# Altium PCB WOLFMAN.PcbDoc (part 2 of 2)
Units mil, origin at the board's own origin, x right, y up, seen from the top; angles counter-clockwise.
Board outline 1610.24 x 1562.99 mil, 4 copper layers (Top Layer, Signal Layer 1, Signal Layer 2, Bottom Layer), stack 30.635 mil thick; 161 components, 149 nets, 706 pads, 227 vias.
Unrouted connection lines stored in the file: 40.
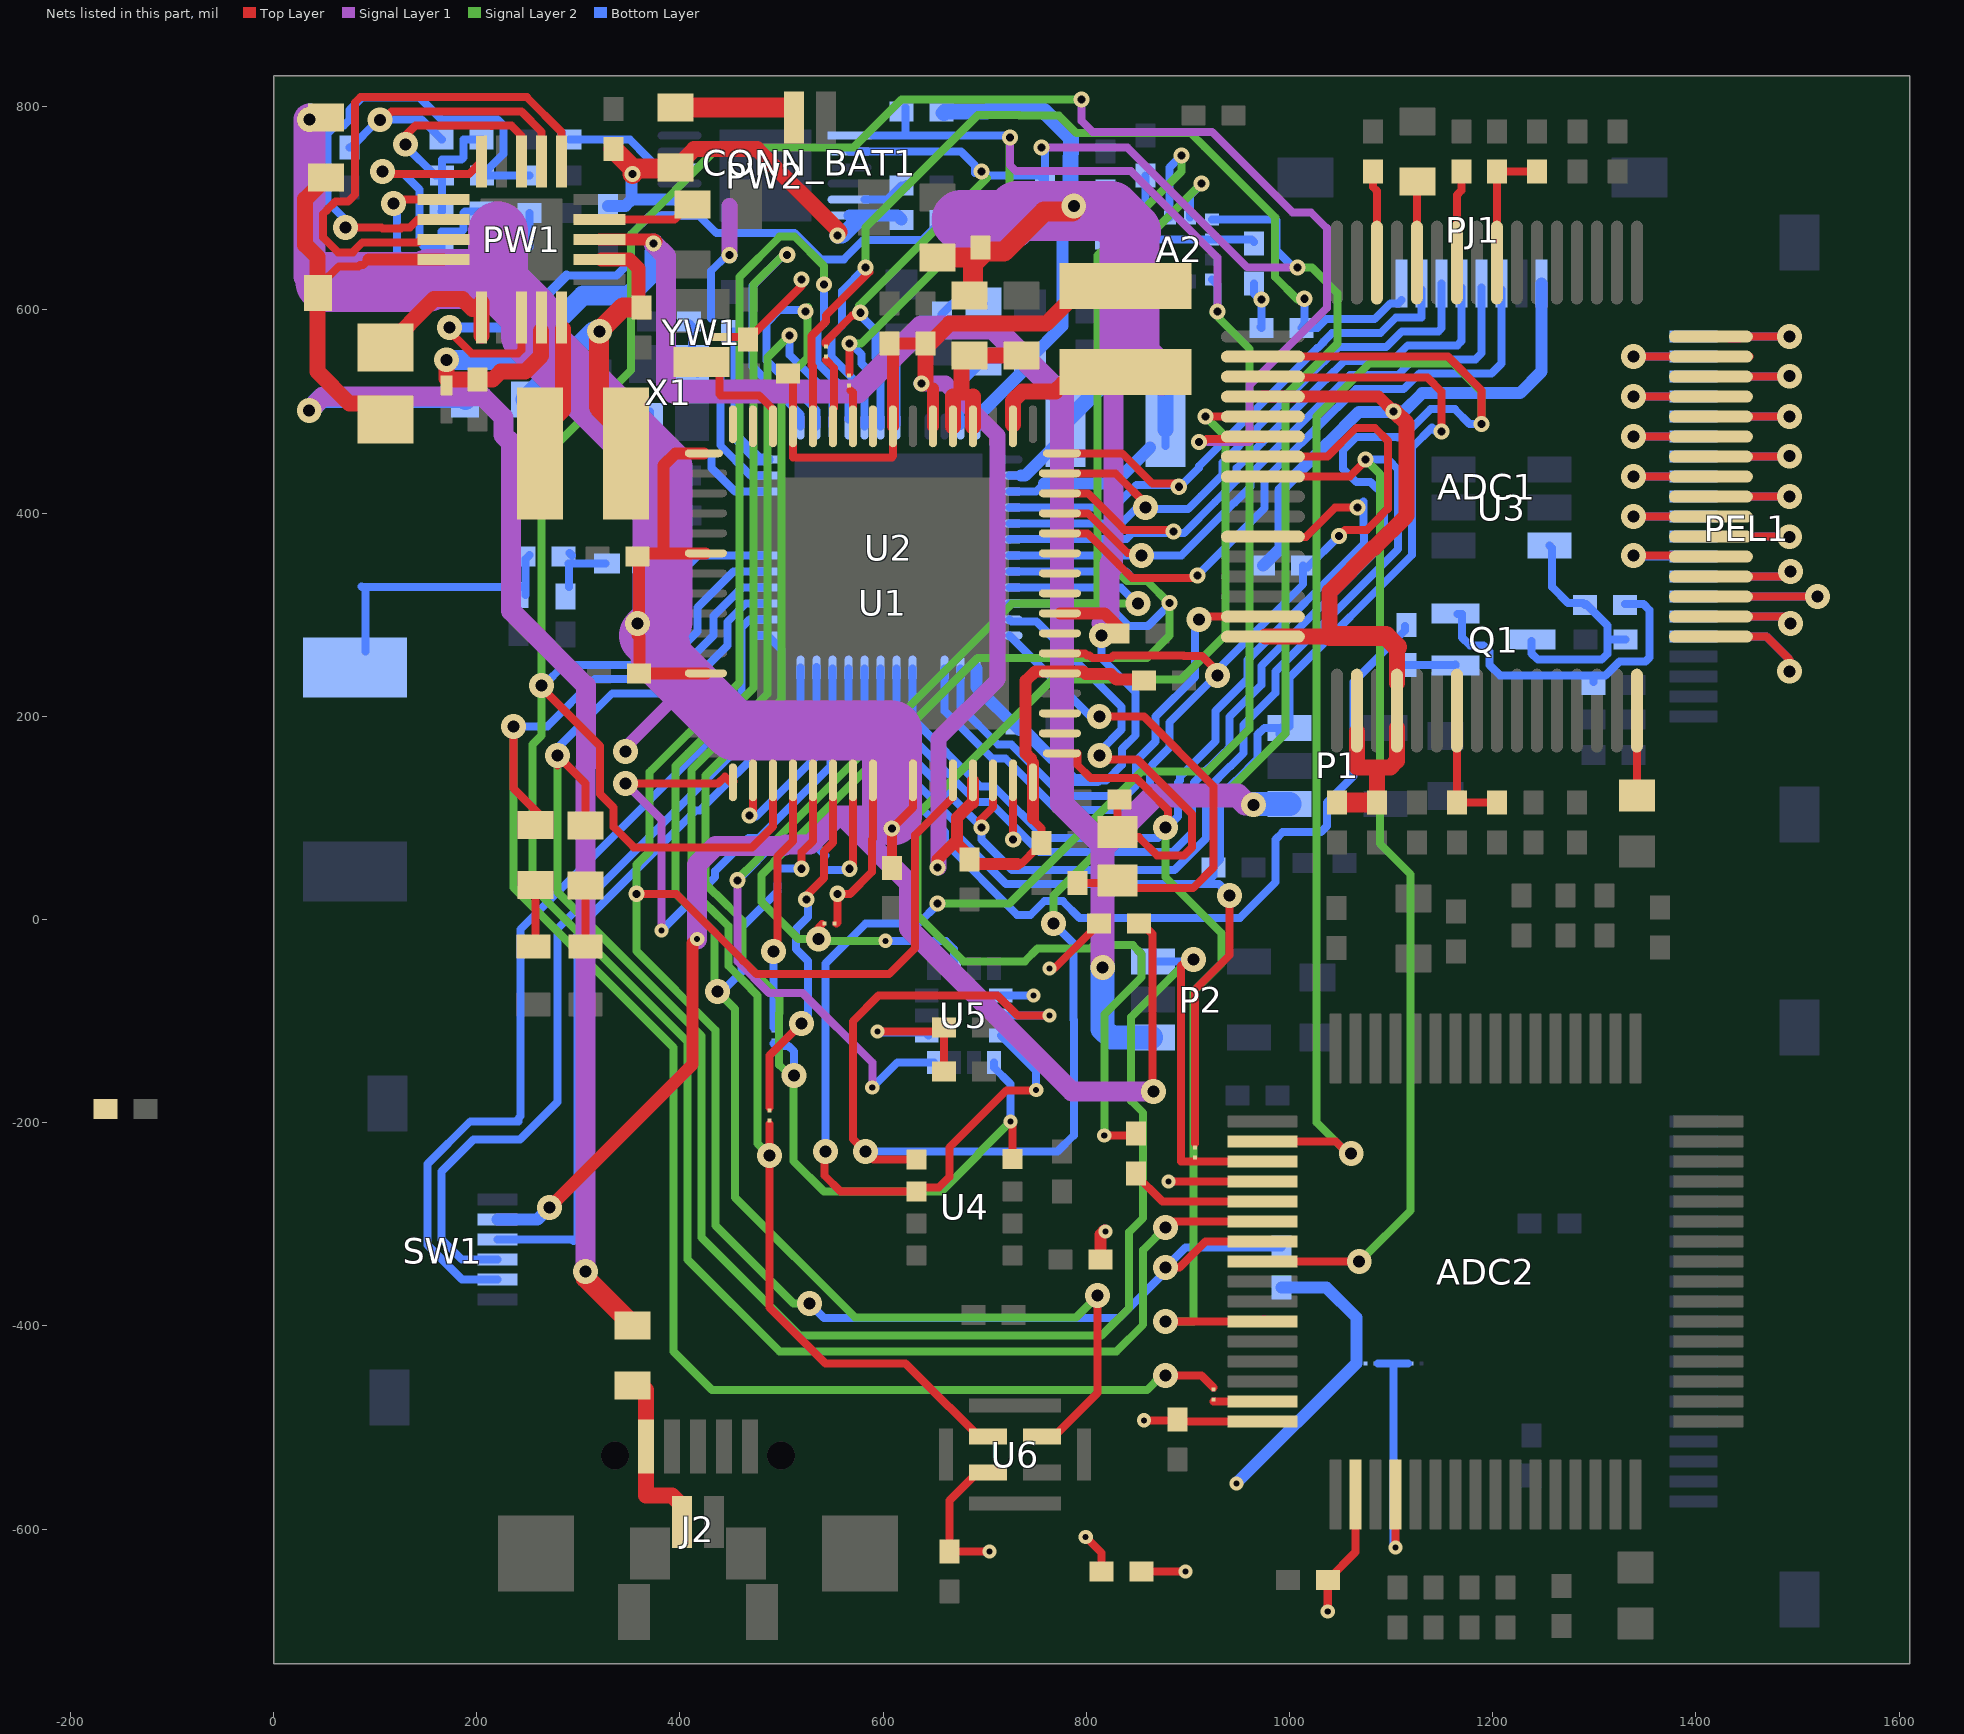
[diagram p4: the nets of this part, all layers, seen from the top]

## Via types
v1: diameter 24.41, hole 11.81, Top Layer to Bottom Layer, 92 vias
v2: diameter 14, hole 6, Top Layer to Bottom Layer, 55 vias
v3: diameter 16, hole 8, Top Layer to Bottom Layer, 36 vias
v4: diameter 25.98, hole 12.99, Top Layer to Bottom Layer, 16 vias
v5: diameter 24.41, hole 11.81, Top Layer to Bottom Layer, tented both sides, 13 vias
v6: diameter 16, hole 8, Top Layer to Bottom Layer, tented both sides, 13 vias
v7: diameter 16, hole 8, Top Layer to Bottom Layer, tented bottom, 2 vias

## Nets (pads, with @x,y where several pads share a name; then routed paths per layer and width w, separated by ;. In a path a pad name is that pad's centre, name@x,y a point inside that pad or via, vN(x,y) a via of type N, cw(c..) or ccw(c..) an arc to the next point about the centre after c; other vN are vias at no path point) (continued)
DVDD: ADC1.36 ADC1.48 ADC1.50 ADC1.52 ADC2.36 ADC2.48 ADC2.50 C1.2 C2.2 C3.2 C4.2 C5.2 C6.2 C7.2 C17.1 C20.1 C25.1 CC2.2 CC3.2 CC23.2 CC24.2 JM7.2 PJ1.1 R1.2 R5.2 R10.2 R18.1 R19.1 R21.1 R22.1 R23.1 R24.1 RVDVDD1.2 RVREG1.2 SW1.2 U1.1 U1.6 U1.12 U1.26 U1.40 U2.13 U2.36 U2.48 YW1.4 | length 7269.3
  Top Layer w7.87: YW1.4@438.98,573.63 C2.2@460.63,573.63 ; v6@448.82,653.54 v6@449.49,654.22 ; R23.1@847.07,-3.94 854.83,-3.94 865.2,-14.31 865.2,-168.35 v1(866.14,-169.29) v1@865.2,-170.23 ; v2(856.65,-492.87) 889.02,-492.87 CC23.2@889.76,-492.13 ; v2(880.72,-257.87) ADC2.36@973.43,-257.87 ADC2.36@996.06,-257.87 ; CC23.2@889.76,-494.09 ADC2.48@973.43,-494.09 ADC2.48@993.11,-494.09
  Top Layer w8: C2.2@467.12,570.87 519.68,623.43 v3(519.68,629.92) ; v3(608.54,89.55) 629.25,110.26 U1.26@629.25,137.09 U1.26@629.25,153.54 ; R24.1@854.33,-641.73 v2(897.64,-641.73) ; v2(1037.63,-681.1) CC24.2@1037.63,-649.85 1064.96,-622.52 ADC2.50@1064.96,-567.24
  Top Layer w10: C7.2@608.54,50.78 v3(608.54,89.55)
  Top Layer w11.81: v1(271.65,-283.46) 412.4,-142.72 v2@412.4,-23.06 ; v1(358.27,291.34) 358.27,280.32 359.52,279.07 ; C4.2@359.52,360.51 359.52,279.07 ; C5.2@359.64,242.8 360.03,242.4 U1.12@425.51,242.4 ; C4.2@359.64,360.51 383.86,360.51 ; C5.2@360.09,244.09 360.09,278.5 359.52,279.07 ; U1.1@423.54,458.94 395.81,458.94 383.86,446.99 383.86,360.51 ; U1.6@425.2,360.51 383.86,360.51 ; U1.40@773.94,301.46 817.92,301.46 C6.2@834.65,284.73 ; R21.1@813.99,-334.47 813.99,-310.04 v2@817.92,-306.11 ; ADC1.36@973.78,514.72 1087.64,514.72 v3(1102.36,500)
  Top Layer w15.75: ADC1.48@976.5,278.5 1034.78,278.5 ; 1039.37,279.07 1039.37,322.83 1082.28,365.75 1083.4,365.75 1115.3,397.65 1115.3,488.4 1103.7,500 v3(1102.36,500) ; ADC1.50@1066.3,185.04 1066.3,149.61 1099.14,149.61 1105.67,156.14 ADC1.52@1105.67,188.41 ; CC2.2@1085.98,115.2 1085.98,149.35 ; ADC1.52@1105.67,232.91 1105.67,268.35
  Top Layer w19.68: C1.2@653.54,651.57 688.64,651.57 C3.2@688.98,651.91 ; RVREG1.2@688.31,612.84 688.31,645.28 700.51,657.48 719.14,657.48 758.54,696.88 v1@786.48,696.88 ; 1039.37,279.07 1094.95,279.07 1105.67,268.35 ; CC3.2@1046.61,115.2 CC2.2@1085.98,115.2
  Signal Layer 1 w7.87: 812.72,295.28 814.96,293.03 v5(814.96,279.53)
  Signal Layer 1 w11.81: v1(346.46,165.35) 342.13,165.35 397.24,220.47
  Signal Layer 1 w15.75: v6(448.82,653.94) 448.82,702.44
  Signal Layer 1 w19.68: v2@416.96,-19.68 v2(416.96,-19.12) 416.96,54.4 434.76,72.2 502.35,72.2 503.9,73.75 528.01,73.75 556.62,102.36 ; 608.54,102.36 559.06,102.36 625.59,35.83 625.59,-8.96 785.92,-169.29 v1(866.14,-169.29) ; v5@814.96,291.34 822.83,299.21 822.83,350.23 826.38,346.69 826.38,369.85 826.77,370.24 826.77,686.51 830.71,690.45
  Signal Layer 1 w31.5: 35.43,633.46 v5(35.43,787.4)
  Signal Layer 1 w39.37: 842.52,557.52 851.93,557.52 874.02,535.43
  Signal Layer 1 w59.06: 51.18,627.65 150.83,627.65 153.49,630.31 218.39,630.31 221.06,627.65 ; 221.06,677.17 221.06,627.65 ; 608.54,102.36 608.54,185.98 453.63,185.98 380.72,258.9 380.72,268.26 369.29,279.69 382.92,293.32 382.92,445.26 253.54,574.64 253.54,595.17 221.06,627.65 ; 677.12,688.58 723.57,688.58 732.24,697.24 823.92,697.24 830.71,690.45 842.52,678.64 ; 842.52,557.52 842.52,678.64 ; 843.99,677.17 842.52,678.64
  Bottom Layer w7.87: 430.79,591.41 430.79,638.52 446.2,653.94 v6(448.82,653.94) ; 813.15,137.8 814.26,136.69 819.53,136.69 835.2,152.36 835.2,168.08 848.54,181.42 848.54,223.59 835.2,236.93 835.2,237.37 ; v5(814.96,279.53) 814.96,257.17 834.76,237.37 ; R22.1@964.9,625.98 964.9,616.04 v3@970.71,610.24 ; R1.2@972.44,582.05 971.44,583.05 972.44,584.05 v3(972.44,610.24)
  Bottom Layer w11.81: SW1.2@220.47,-295.28 259.84,-295.28 v1(271.65,-283.46) ; C20.1@452.76,576.77 455.43,574.09 455.43,474.68 477.36,452.76 U2.36@486.22,452.76 ; R18.1@657.48,793.7 R18.1@659.84,793.7 ; U2.13@691.93,247.05 691.93,228.83 C25.1@734.03,186.73 ; U2.48@691.93,485.24 691.93,494.09 C17.1@748.03,550.2 ; C25.1@732.28,191.81 732.28,191.34 734.02,191.34 748.03,177.32 748.03,177.08 787.63,137.47 810.89,137.47 ; C17.1@744.69,552.44 776.57,584.33 776.57,681.28 783.46,688.16 ; R19.1@759.08,685.04 776.4,685.04 779.53,688.16 ; v2(947.7,-555.12) 947.7,-554.98 1065.67,-437.01 1065.67,-391.6 1036.27,-362.2 R10.2@992.13,-362.2 ; R5.2@974.01,348.44 991.26,365.69 991.26,422.76 1036.91,468.41 1037,468.41 1068.36,499.76 v3@1100.81,499.76 ; v3(1102.36,500) 1112.4,500 1130.51,518.11 1226.77,518.11 1248.03,539.37 PJ1.1@1248.03,625.98
  Bottom Layer w15.75: R18.1@659.84,793.7 661.42,795.28 701.83,795.28 702.26,795.7 758.36,795.7 784.78,769.28 783.7,702.5 783.46,688.16
  other v1: 787.63,702.44
  other v2: 818.9,-307.09
DVDD_OUT: CC35.2 L4.2 PW1.14 RVDVDD1.1 | length 409.1
  Top Layer w7.87: CC35.2@47.24,625.98 64.17,642.91 83.72,642.91 84.9,644.09 87.94,644.09 93.45,649.61
  Top Layer w11.81: 93.45,649.61 PW1.14@167.32,649.61
  Top Layer w15.75: RVDVDD1.1@52.83,730.75 31.1,709.01 31.1,664.12 43.31,651.91 43.31,539.33 74.76,507.87 L4.2@104.01,507.87
EL1: ADC1.16 PEL1.20 | length 183.1
  Top Layer w7.87: ADC1.16@1414.72,573.78 v1(1492.13,573.78) ; ADC1.16@1433.07,571.81 ADC1.16@1442.8,571.81
  Bottom Layer w7.87: PEL1.20@1397.64,573.78 v1(1492.13,573.78) v1@1493.15,574.8
EL2: ADC1.14 PEL1.18 | length 173.7
  Top Layer w7.87: ADC1.14@1414.72,534.41 1491.74,534.41 v1(1492.13,534.8)
  Bottom Layer w7.87: PEL1.18@1397.64,534.41 1491.73,534.41 v1@1493.15,535.83
EL3: ADC1.12 PEL1.16 | length 172.9
  Top Layer w7.87: ADC1.12@1414.72,495.04 v1@1491.74,495.04
  Bottom Layer w7.87: PEL1.16@1397.64,495.04 v1(1492.13,495.04) v1@1493.15,496.06
EL4: ADC1.10 PEL1.14 | length 173.6
  Top Layer w7.87: ADC1.10@1414.72,455.67 1491.46,455.67 v1@1492.13,455
  Bottom Layer w7.87: PEL1.14@1397.64,455.67 1492.13,455.67 v1@1493.15,456.69
  other v1: 1492.13,456.02
EL5: ADC1.8 PEL1.12 | length 172.9
  Top Layer w7.87: ADC1.8@1414.72,416.3 v1(1492.13,416.3)
  Bottom Layer w7.87: PEL1.12@1397.64,416.3 v1@1493.15,416.3
EL6: ADC1.6 PEL1.10 | length 173.1
  Top Layer w7.87: ADC1.6@1414.72,376.93 1491.94,376.93 v1(1492.13,376.75)
  Bottom Layer w7.87: PEL1.10@1397.64,376.93 1492.97,376.93 v1@1493.15,376.75
EL7: ADC1.4 PEL1.8 | length 175.9
  Top Layer w7.87: ADC1.4@1414.72,337.56 v1@1490.12,337.56
  Bottom Layer w7.87: PEL1.8@1397.64,337.56 1491.1,337.56 v1@1496.06,342.52
  other v1: 1493.15,342.52
EL8: ADC1.2 PEL1.6 | length 182.2
  Top Layer w7.87: ADC1.2@1417.32,299.21 1418.35,298.19 1493.15,298.19 v1(1493.15,291.34)
  Bottom Layer w7.87: PEL1.6@1397.64,298.19 1484.39,298.19 v1@1493.15,289.43
ELM1: ADC1.15 PEL1.19 | length 172.1
  Top Layer w7.87: v1(1338.58,554.09) ADC1.15@1414.72,554.09 ADC1.15@1452.74,554.09
  Bottom Layer w7.87: v1@1340.17,555.12 1341.19,554.09 PEL1.19@1397.64,554.09
ELM2: ADC1.13 PEL1.17 | length 141.9
  Top Layer w7.87: v1(1338.58,514.72) ADC1.13@1414.72,514.72 ADC1.13@1417.32,514.72
  Bottom Layer w7.87: v1@1334.91,515.75 1335.93,514.72 PEL1.17@1397.64,514.72
ELM3: ADC1.11 PEL1.15 | length 134.6
  Top Layer w7.87: v1(1338.58,475.51) 1412.83,475.51 ADC1.11@1412.99,475.35 ; ADC1.11@1414.72,475.35 ADC1.11@1415.12,475.75 ; ADC1.11@1419.32,475.75 ADC1.11@1419.56,475.51
  Bottom Layer w7.87: v1@1338.44,475.51 1338.6,475.35 PEL1.15@1397.64,475.35
ELM4: ADC1.9 PEL1.13 | length 130.1
  Top Layer w7.87: v1(1338.58,435.98) ADC1.9@1409.45,435.98
  Bottom Layer w7.87: v1@1338.44,435.98 v1(1338.58,435.98) PEL1.13@1397.64,435.98
ELM5: ADC1.7 PEL1.11 | length 134.4
  Top Layer w7.87: v1(1338.58,396.77) 1412.99,396.77 ADC1.7@1413.39,396.38
  Bottom Layer w7.87: v1@1338.6,397.49 1339.48,396.61 PEL1.11@1397.64,396.61
ELM6: ADC1.5 PEL1.9 | length 138.4
  Top Layer w7.87: v1(1338.58,358.27) ADC1.5@1417.32,358.27
  Bottom Layer w7.87: v1@1338.44,358.27 1339.47,357.24 PEL1.9@1397.64,357.24
ELM7: ADC1.3 PEL1.7 | length 231
  Top Layer w7.87: ADC1.3@1414.72,317.87 v1@1523.62,317.87
  Bottom Layer w7.87: PEL1.7@1397.64,317.87 v1(1519.68,317.87) v1(1519.68,317.87)
ELM8: ADC1.1 PEL1.5 | length 213.6
  Top Layer w7.87: ADC1.1@1414.72,278.5 1469.53,278.5 1492.13,255.91 v1(1492.13,244.34)
  Bottom Layer w7.87: PEL1.5@1397.64,278.5 1469.53,278.5 1491.1,256.93 v1@1491.1,244.03
I2C.SCL: U1.63
I2C.SDA: U1.64
I2S0_SCK: U1.43
I2S0_SDI: U1.41
I2S0_WS: U1.42
I2S1_SDI: U1.39
IMU_A_DVDD: A2.2 A2.9 A2.10 CA1.2 CA2.2 CA3.2 R22.2 | length 256.2
  Bottom Layer w7.87: CA2.2@818.9,672.09 CA1.2@818.9,716.54 ; CA2.2@819.61,671.05 821.09,669.57 A2.9@860.63,669.57 ; CA3.2@858.27,732.28 858.27,692.21 A2.10@861.43,689.05 ; A2.10@859.51,689.25 860.63,688.14 A2.9@860.63,669.57 ; A2.2@923.62,669.29 923.34,669.57 A2.9@860.63,669.57 ; A2.2@923.62,669.57 962.41,669.57 R22.2@964.9,667.07
IN_CS_ADC_A: ADC1.39 R5.1 U1.38 U2.15 | length 1057.1
  Top Layer w7.87: U1.38@773.94,262.09 798.86,262.09 800.85,260.09 803.22,260.09 805.83,257.48 824.09,257.48 826.7,260.09 895.41,260.09 896.05,259.45 913.78,259.45 929.13,244.09 v1(929.13,240.16) ; ADC1.39@973.78,455.67 1037.32,455.67 1065.67,484.02 1083.94,484.02 1096.85,471.1 1096.85,404.25 ; v3(1048.58,377.6) 1054.45,383.46 1076.06,383.46 1088.97,396.38 1088.97,396.77 1096.46,404.25
  Bottom Layer w7.87: U2.15@660.43,247.05 660.43,205.45 707.54,158.35 720.65,158.35 771.13,107.87 844.29,107.87 862.76,126.34 862.76,146.3 864.57,148.11 864.57,152.17 881.89,169.5 881.89,175.9 881.89,194.17 931.81,244.09 931.81,248.52 1013.38,330.09 R5.1@1013.38,348.44 ; R5.1@1015.75,346.46 1017.44,346.46 v3(1048.58,377.6)
IN_CS_ADC_B: ADC2.39 R10.1 U1.28 U2.40 | length 2510.2
  Top Layer w7.87: v3(357.22,25.28) 396.38,25.28 462.2,-40.55 462.2,-40.63 475.12,-53.54 605.98,-53.54 631.49,-28.03 631.49,83.22 668.62,120.35 U1.28@668.62,137.09 ; v1(877.95,-342.52) 891.73,-342.52 917.32,-316.93 ADC2.39@973.43,-316.93
  Signal Layer 2 w7.87: 357.22,54.07 370.08,66.93 370.08,145.08 372.19,147.18 458.66,233.66 458.66,632.58 498.14,672.06 512.92,672.06 541.69,643.29 v3(541.69,625) ; 358.27,54.07 357.22,53.02 v3(357.22,25.28) 357.22,-31.04 435.04,-108.86 435.04,-301.18 511.81,-377.95 v1@525.59,-377.95
  Bottom Layer w7.87: v1(527.56,-377.95) 541.73,-392.13 832.28,-392.13 v1@877.95,-346.46 ; v3(541.69,625) 541.69,586.41 535.31,580.03 535.31,547.88 565.94,517.24 U2.40@565.94,492.13 ; v1(877.95,-342.52) 897.67,-322.83 R10.1@992.13,-322.83
JTAG.T\R\S\T\: PJ1.7 U1.48 U2.4 | length 641.6
  Top Layer w7.87: U1.48@775.91,458.94 835.3,458.94 865.2,429.04 887.52,429.04 v7@890.57,425.98
  Bottom Layer w7.87: U2.4@724.41,405.51 724.48,405.44 826.53,405.44 836.05,414.96 836.22,414.96 849.11,427.85 889.15,427.85 v7(891.02,425.98) 891.02,426.46 891.49,425.98 892.24,425.98 910.89,444.63 910.89,446.19 961.98,497.27 1027.1,562.36 1027.7,562.36 1033.46,568.13 1033.46,568.73 1041.9,577.17 1089.34,577.17 1104.97,592.8 1129.33,592.8 ; 1129.92,592.8 PJ1.7@1129.92,620.08
JTAG.TCK: PJ1.3 U1.44 U2.8 | length 818.4
  Top Layer w7.87: U1.44@773.94,380.2 801.05,380.2 832.28,348.96 832.28,348.82 844.88,336.22 907.09,336.22 v3(909.45,338.58)
  Bottom Layer w7.87: U2.8@724.41,342.52 838.9,342.52 845.2,336.22 906.7,336.22 975.51,405.03 975.51,432.83 1046.18,503.5 1046.79,503.5 1065.33,522.05 1112.17,522.05 1127.8,537.68 1182.75,537.68 1183.03,537.4 1198.82,537.4 1208.66,547.24 PJ1.3@1208.66,620.08
JTAG.TDI: PJ1.6 U1.47 U2.5 | length 661.6
  Top Layer w7.87: U1.47@773.94,439.25 828.46,439.25 v1@862.2,405.51
  Bottom Layer w7.87: U2.5@724.41,389.76 759.08,389.76 ; 754.37,389.76 834.41,389.76 850.15,405.51 v1(858.26,405.51) ; v1@861.5,405.77 863.33,403.94 894.96,403.94 900.15,403.94 913.07,416.85 913.07,416.93 934.17,438.03 934.17,449.98 967.69,483.49 1032.8,548.58 1033.41,548.58 1047.24,562.42 1047.24,563.02 1047.61,563.39 1095.05,563.39 1110.68,579.02 1146.57,579.02 1149.61,582.05 PJ1.6@1149.61,626.26
JTAG.TDO: PJ1.5 U1.46 U2.6 | length 711
  Top Layer w7.87: U1.46@773.94,419.57 801.63,419.57 834.56,386.63 834.56,386.57 837.67,383.46 884.25,383.46 v3(885.83,381.89)
  Bottom Layer w7.87: U2.6@724.41,374.02 724.8,374.41 839.29,374.41 845.2,380.31 896.02,380.31 926.85,411.14 926.85,411.22 947.95,432.32 947.95,444.27 973.4,469.72 1034.77,531.06 1035.37,531.06 1053.92,549.61 1100.76,549.61 1116.39,565.24 1165.08,565.24 1169.29,569.45 1169.29,576.77 ; 1169.29,578.74 PJ1.5@1169.29,622.05
JTAG.TMS: PJ1.4 U1.45 U2.7 | length 700.6
  Top Layer w7.87: U1.45@773.94,399.88 801.45,399.88 840.71,360.63 v1@847.71,360.63
  Bottom Layer w7.87: U2.7@724.41,358.27 v1(854.33,358.27) ; v1@862.82,358.27 893.46,358.27 940.63,405.44 940.63,405.51 945.59,410.47 946.1,410.47 961.73,426.1 961.73,438.54 1040.48,517.28 1041.08,517.28 1059.62,535.83 1106.47,535.83 1122.1,551.46 1183.03,551.46 1188.98,557.4 1188.98,571.01 PJ1.4@1188.98,622.05
LED_1: JM5.1 R2.2 U2.28 | length 1654.6
  Top Layer w7.87: v1(236.22,190.04) 236.22,128.97 262.39,102.8 R2.2@263.78,102.8 ; v1(877.98,-448.82) 913.39,-448.82 925.2,-460.63
  Signal Layer 2 w7.87: v1@236.22,192.91 v1(236.22,190.04) 236.22,31.5 393.7,-125.98 393.7,-425.2 431.5,-462.99 859.84,-462.99 v1@874.02,-448.82
  Bottom Layer w7.87: v1(236.22,190.04) 236.41,190.23 269.48,190.23 316.19,236.93 390.27,236.93 433.07,279.73 433.07,298.82 461.03,326.77 U2.28@486.22,326.77
LED_2: ADC2.35 JM6.2 P2.3 R3.2 U2.27 | length 2116.4
  Top Layer w7.87: v1(279.53,161.49) 279.53,151.59 284.48,156.54 307.09,133.93 R3.2@307.09,92.52 R3.2@307.09,91.46 ; v5(905.51,-39.37) 899.29,-39.37 893.31,-45.35 893.31,-238.19 ADC2.35@973.43,-238.19 ADC2.35@993.11,-238.19
  Signal Layer 2 w7.87: v1(279.53,161.49) 279.53,27.16 421.26,-114.57 421.26,-312.99 517.72,-409.45 814.96,-409.45 842.12,-382.29 842.12,-307.48 855.9,-293.7 855.9,-190.23 844.09,-178.42 844.09,-95.91 899.06,-40.95 903.93,-40.95 v5(905.51,-39.37)
  Bottom Layer w7.87: v1(279.53,161.49) 278.97,161.49 275.59,164.87 333.43,222.71 399.88,222.71 446.85,269.68 446.85,293.11 464.76,311.02 U2.27@486.22,311.02 ; P2.3@865.83,-41.34 903.45,-41.34 v5@905.42,-39.37
MIC_DVDD: CA10.2 R24.2 U6.VDD | length 177
  Top Layer w7.87: U6.VDD@700.79,-544.29 692.84,-544.29 665.35,-571.78 CA10.2@665.35,-622.05 v2(704.72,-622.05) ; v2(799.3,-607.64) 814.96,-623.29 R24.2@814.96,-641.73
MISO: ADC1.43 ADC2.43 U1.33 U2.17 | length 1662.5
  Top Layer w7.87: U1.33@775.91,163.66 791.11,163.66 791.11,152.36 804.02,139.44 848.97,139.44 860.92,127.49 860.92,127.27 880.32,107.87 v1@880.32,92.52 ; v1(877.98,-395.67) 972.76,-395.67 ADC2.43@974.72,-393.7 ; ADC1.43@970.64,376.75 1016.14,376.75 1044.9,405.51 v3(1066.92,405.51)
  Signal Layer 2 w7.87: v1(877.95,90.55) 877.95,41.74 933.07,-13.39 933.07,-43.31 905.51,-70.87 905.51,-395.67 v1(877.98,-395.67)
  Bottom Layer w7.87: U2.17@628.94,247.05 628.94,197.98 696.13,130.79 709.24,130.79 759.71,80.31 870.41,80.31 v1@877.95,87.86 ; v1@879.5,90.55 890.32,101.37 890.32,134.88 892.12,136.69 892.12,140.76 902.82,151.45 ; 903.35,151.97 903.62,151.97 927.17,175.51 927.17,205.32 958.66,236.81 958.66,255.44 1073.03,369.81 1073.03,380.18 1072.7,380.5 1072.7,411.54 1066.92,405.77 v3(1066.92,405.51)
MLIMU_DVDD: CA6.2 CA7.2 CA8.2 R23.2 U5.5 U5.12 | length 255.4
  Top Layer w7.87: v2(594.49,-110.24) 659.01,-110.24 659.72,-110.95 CA8.2@659.72,-149.61 ; v2(763.78,-48.23) 768.31,-48.23 R23.2@812.6,-3.94
  Bottom Layer w7.87: v2(594.49,-110.24) 595.47,-111.22 641.73,-111.22 U5.5@644.69,-114.17 ; U5.12@715.83,-74.8 v2(748.03,-74.8)
MOSI: ADC1.34 ADC2.34 U1.31 U2.18 | length 2400.3
  Top Layer w7.87: v3@727.68,80.95 U1.31@727.68,137.09 ; ADC1.34@973.78,554.09 1155.82,554.09 1188.98,520.94 v3(1188.98,487.87) ; ADC2.34@993.11,-218.5 1045.51,-218.5 v1@1059.29,-232.28
  Signal Layer 2 w7.87: v1@1059.06,-224.41 1051.41,-224.41 1026.54,-199.54 1026.54,495.25 1078.53,547.24 1161.42,547.24 1188.98,519.68 v3(1188.98,487.87)
  Bottom Layer w7.87: U2.18@613.19,247.05 613.19,194.24 691.56,115.87 704.67,115.87 754,66.54 885.12,66.54 904.1,85.52 904.1,129.18 905.9,130.98 905.9,134.77 936.28,165.15 936.64,165.15 940.94,169.45 940.94,199.61 972.44,231.1 972.44,249.74 1093.17,370.47 1093.17,417.32 1079.79,430.71 1065.67,430.71 1052.75,443.62 1052.75,461.88 1065.67,474.8 1108.97,474.8 ; 1106.95,474.68 1111.02,474.68 1138.7,502.36 1162.67,502.36 1177.16,487.87 v3(1188.98,487.87)
  other v1: 1060.63,-230.31
  other v3: 727.95,78.74
NetA1_1: A1.1 XX1.2 XX3.1 | length 266.2
  Bottom Layer w7.87: 86.61,327.72 86.93,327.4 90.55,327.4 ; A1.1@90.55,263.78 90.55,327.4 ; XX3.1@248.03,319.21 XX3.1@248.03,327.4 ; XX1.2@251.97,358.65 248.03,354.71 XX3.1@248.03,327.4 ; 90.55,327.4 XX3.1@248.03,327.4
NetADC1_37: ADC1.37 RJ2.1 | length 1225.3
  Top Layer w7.87: v2(817.65,-212.6) 847,-212.6 RJ2.1@848.97,-210.63 ; v7(917.32,495.04) ADC1.37@968.5,495.04
  Signal Layer 2 w7.87: v2(817.65,-212.6) 817.65,-93.37 854.33,-56.69 854.33,-33.86 845.67,-25.2 806.92,-25.2 803.54,-28.57 751.97,-28.57 739.42,-41.12 679.23,-41.12 633.86,4.25 633.86,103.35 766.73,236.22 893.26,236.22 937.01,279.97 937.01,475.35 v7(917.32,495.04)
NetADC2_37: ADC2.37 RJ2.2 | length 137
  Top Layer w7.87: RJ2.2@847.71,-250.39 874.88,-277.56 ADC2.37@973.43,-277.56
NetADC2_47: ADC2.47 JM5.2 | length 67.9
  Top Layer w7.87: 925.2,-474.41 ADC2.47@993.11,-474.41
NetADC2_52: ADC2.52 JM7.1 JM8.2 | length 263.7
  Top Layer w8: v2(1104.33,-618.11) ADC2.52@1104.33,-565.94
  Bottom Layer w7.87: 1087.15,-437.01 1116.72,-437.01
  Bottom Layer w8: 1102.36,-437.01 1102.36,-616.14 v2(1104.33,-618.11)
NetC23_2: C23.2 L3.1 U2.30 | length 117.8
  Bottom Layer w7.87: L3.1@363.66,348.44 364.56,347.55 C23.2@401.57,347.55 ; 410,350.28 417.99,358.27 U2.30@486.22,358.27
NetCC39_2: CC39.2 PW1.4 | length 94.6
  Top Layer w7.87: PW1.4@320.87,688.98 394.81,688.98 CC39.2@409.44,703.61
NetCC41_2: CC41.2 PW2.5 | length 47.3
  Bottom Layer w7.87: PW2.5@581.69,708.66 604.12,708.66 CC41.2@618.11,722.65 ; CC41.2@623.03,721.73 620.92,721.73 CC41.2@623.03,723.84
NetD1_1: D1.1 R2.1 | length 58.8
  Top Layer w7.87: D1.1@257.87,-24.61 R2.1@257.87,34.17
NetD2_1: D2.1 R3.1 | length 61.7
  Top Layer w7.87: R3.1@307.09,33.46 307.09,-22.64 D2.1@311.02,-26.57
NetJ2_1: J2.1 R25.1 | length 61.8
  Top Layer w15.75: R25.1@362.2,-458.66 366.54,-462.99 J2.1@366.54,-518.7
NetL1_2: L1.2 L2.1 | length 45.8
  Bottom Layer w7.87: L1.2@657.48,595.47 668.31,606.3 L2.1@698.81,606.3
NetL2_2: L2.2 U2.47 | length 73
  Bottom Layer w7.87: U2.47@676.18,485.83 676.18,526.86 L2.2@698.81,549.49
NetL4_1: L4.1 PW1.16 | length 141.6
  Top Layer w15.75: L4.1@110.24,562.99 157.87,610.63 185.96,610.63 195.61,600.98 ; PW1.16@204.72,574.8 PW1.16@204.72,592.52 PW1.16@204.72,607.3
NetL5_2: L5.2 PW1.20 | length 115.6
  Top Layer w11.02: L5.2@271.65,487.48 273.19,489.02 L5.2@273.62,489.45
  Top Layer w15.75: L5.2@262.2,500 273.19,489.02 272.83,489.37 285.04,501.57 PW1.20@285.04,581.1
NetLW1_2: LW1.2 U1.50 | length 122.5
  Top Layer w7.87: LW1.2@838.58,531.76 LW1.2@838.58,538.86
  Top Layer w15.75: U1.50@727.68,487.48 727.68,510.5 737.14,519.96 769.45,519.96 777.05,527.56 LW1.2@783.46,527.56 ; LW1.2@781.54,539.37 LW1.2@811.02,539.37
NetPW1_6: PW1.6 PW1.13 | length 510.7
  Top Layer w7.87: 52.43,698.24 60.88,706.69 73.43,706.69 80.31,713.58 80.31,804.4 85.36,809.45 249.21,809.45 283.46,775.19 PW1.6@283.46,746.06 ; 52.54,698.24 52.43,698.13 52.33,698.13 48.82,694.63 48.82,671.46 63.58,656.69 78.01,656.69 78.01,657.07 87.56,666.61 142.36,666.61 PW1.13@145.67,669.92
NetPW1_7: PW1.7 R11.2 R15.1 | length 282.4
  Top Layer w7.87: v1@106.3,785.43 116.14,795.28 243.9,795.28 263.78,775.39 PW1.7@263.78,769.69
  Bottom Layer w7.87: R15.1@74.8,759.84 76.1,759.84 v1@101.6,785.35 ; v1(104.62,787.2) 104.62,787.59 145.68,787.59 159.65,773.62 R11.2@165.58,767.72
NetPW1_8: PW1.8 R11.1 R12.1 R13.1 | length 300.9
  Top Layer w7.87: v1(129.92,763.07) 129.92,771.65 139.76,781.5 214.31,781.5 214.57,781.24 214.82,781.5 234,781.5 244.09,771.4 244.09,767.91 PW1.8@243.9,767.72
  Bottom Layer w7.87: v1@124.21,765.54 125.97,763.78 127.65,763.78 v1@129.92,761.51 ; v1(129.92,763.07) v1@129.92,761.51 ; R12.1@165.35,696.85 165.58,697.08 R13.1@165.58,732.28 ; R11.1@204.95,767.72 R11.1@204.72,767.72 187.01,767.72 187.01,749.91 185.12,748.03 165.58,748.03 R13.1@165.58,732.28 ; v1@129.92,761.51 159.15,732.28 R13.1@165.58,732.28
NetPW1_10: PW1.10 R12.2 R14.1 | length 308.9
  Top Layer w7.87: v1(107.08,736.22) v1@105.51,736.22 ; PW1.10@204.72,746.06 192.52,733.85 107.87,733.85 v1@105.51,736.22 ; v1@102.76,738.97 102.36,739.37 102.76,739.76 v1@102.76,738.97 ; v1@102.76,738.97 v1@105.51,736.22
  Bottom Layer w7.87: v1(107.08,736.22) 107.08,735.78 105.14,733.84 128.37,733.84 143.7,718.5 143.7,710.77 143.7,667.07 149.67,661.1 R14.1@165.35,661.1 165.35,677.17 185.22,677.17 187.01,678.96 187.01,695.63 188.23,696.85 R12.2@203.95,696.85
NetPW1_11: PW1.11 R14.2 R16.1 | length 269.9
  Top Layer w7.87: v1@124.21,708.66 PW1.11@167.32,708.66
  Bottom Layer w7.87: v1@116.14,700.79 121.65,695.27 121.65,656.37 140.23,637.8 185.04,637.8 R14.2@204.72,657.48 ; R14.2@204.72,661.1 250.96,661.1 251.97,662.11 R16.1@251.97,695.63
  other v1: 118.11,704.72
NetPW1_12: PW1.12 R13.2 R17.1 | length 501.6
  Top Layer w7.87: v1(70.86,681.1) v1@73.23,678.74 ; 83.19,681.1 106.29,681.1 107.01,680.39 125.27,680.39 125.98,681.1 134.11,681.1 141.99,688.98 PW1.12@167.32,688.98
  Bottom Layer w7.87: v1(70.86,681.1) 70.86,688.84 53.15,706.55 53.15,773.76 60.88,781.5 69.1,781.5 74.8,787.2 74.8,796.85 87.2,809.25 143.51,809.25 165.35,787.4 220.61,787.4 226.38,781.64 226.38,753.71 R13.2@204.95,732.28 R17.1@251.97,732.28
NetPW2_10: PW2.10 R20.1 | length 113.7
  Bottom Layer w7.87: R20.1@291.34,767.72 350.59,767.72 368.11,750.2 376.18,742.13 376.38,742.13 376.38,741.04 377.26,740.16 PW2.10@392.95,740.16
NetQ1_1: Q1.1 R6.2 | length 48.8
  Bottom Layer w7.87: R6.2@1114.97,250.33 1162.33,250.33 Q1.1@1162.66,250 ; Q1.1@1163.39,250 Q1.1@1163.39,250.96
NetQ1_2: Q1.2 R7.2 R8.1 | length 322.1
  Bottom Layer w7.87: Q1.2@1165.35,300.51 1169.73,300.51 1169.73,277.75 1177.79,269.68 1191.08,269.68 1196.85,263.92 1196.85,250.63 1207.32,240.16 R8.1@1299.21,240.16 ; R8.1@1299.21,233.82 R8.1@1299.21,240.16 ; R7.2@1330,310.55 1348.23,310.55 1354.33,304.45 1354.33,258.01 1350.25,253.94 1324.82,253.94 1311.04,240.16 R8.1@1299.21,240.16
NetU1_62: U1.62 YW1.3 | length 142.5
  Top Layer w7.87: YW1.3@421.26,549.02 YW1.3@438.77,549.02 ; YW1.3@421.26,549.21 438.58,549.21 YW1.3@438.77,549.02 ; U1.62@491.46,485.51 491.46,502.24 477.68,516.02 440.05,516.02 438.77,517.3 YW1.3@438.77,549.02
P0.00/XL1: C16.1 U2.2 X2.1 | length 186
  Bottom Layer w7.87: U2.2@735.73,437.01 U2.2@724.41,437.01 U2.2@737.01,437.01
  Bottom Layer w11.81: U2.2@735.73,437.01 739.79,437.01 773.41,470.62 773.41,474.68 X2.1@779.36,480.64
  Bottom Layer w15.75: X2.1@779.36,480.64 779.36,489.6 830.71,540.94 C16.1@830.71,557.4
P0.01/XL2: C19.1 U2.3 X2.2 | length 256.5
  Bottom Layer w7.87: U2.3@724.41,421.26 737.57,421.26 750.62,421.26 758.49,429.13 ; X2.2@877.95,466.3 X2.2@877.95,480.31 ; X2.2@877.95,482.19 X2.2@879.5,480.64
  Bottom Layer w11.81: 758.49,429.13 827.39,429.13 X2.2@862.82,464.57
  Bottom Layer w15.75: C19.1@861.43,559.33 877.95,542.81 X2.2@877.95,482.19
P0.07: A2.11 JM3.2 U2.9 U5.4 | length 1635.4
  Signal Layer 1 w7.87: v3@456.69,33.7 456.69,-41.12 487.75,-72.18 520.68,-72.18 589.29,-140.79 v2(589.29,-165.35)
  Signal Layer 2 w7.87: v3(456.69,38.58) 456.69,39.89 465.63,48.82 465.83,48.82 478.74,61.73 478.74,62.79 726.97,311.02 811.02,311.02 ; v5(850.79,311.02) 811.02,311.02 ; v3(893.7,751.97) 893.7,736.22 811.02,653.54 811.02,311.02
  Bottom Layer w7.87: v3(456.69,38.58) 496.78,78.66 527.63,78.66 543.31,62.99 ; v2(589.29,-165.35) 613.9,-140.75 U5.4@649.88,-140.75 ; U2.9@724.41,326.77 833.93,326.77 v5@850.15,310.55 ; A2.11@881.89,691.22 881.89,740.15 v3(893.7,751.97)
P0.08: A2.12 JM4.2 U2.10 U5.9 | length 1498.5
  Top Layer w7.87: v5(536.22,-19.12) 536.22,-8.11 539.96,-4.37
  Signal Layer 2 w7.87: 481,16.43 480.32,17.12 480.32,43.82 492.52,56.03 492.52,57.09 692.91,257.48 859.84,257.48 881.89,279.53 v6(881.89,311.54) 881.44,311.54 859.92,333.07 839.96,333.07 826.77,346.26 826.77,637.8 v6(913.39,724.41) ; 481.68,15.75 516.56,-19.12 535.75,-19.12 537.55,-20.93 v2(602.36,-20.93)
  Bottom Layer w7.87: v2(602.36,-20.93) 661.64,-20.93 669.57,-28.85 U5.9@669.57,-48.23 ; U2.10@724.41,311.02 819.61,311.02 841.65,288.98 859.92,288.98 860.37,289.43 860.63,289.43 ; 860.71,288.98 v6@882.28,310.55 ; A2.12@901.97,691.22 901.97,712.42 v6@913.39,723.84
P0.09: C24.2 pad.2 U2.11 | length 467.9
  Top Layer w7.87: v1(813.15,161.49) 817.16,157.48 850.42,157.48 903.93,103.96 903.93,70.87 896.06,62.99 869.7,62.99 851.63,81.07 pad.2@830.71,86.2 830.71,115.98 C24.2@832.84,118.11
  Bottom Layer w7.87: U2.11@724.41,295.28 726.38,293.31 750.81,293.31 834.76,209.35 834.76,190.61 834.65,190.49 834.65,187.01 813.15,165.52 v1(813.15,161.49)
P0.10: C26.2 pad.3 U2.12 | length 486.9
  Top Layer w7.87: C26.2@791.11,35.83 pad.3@829.69,35.83 ; v1(812.72,199.74) 856.65,199.74 925.2,131.19 925.2,51.18 905.11,31.1 835.05,31.1 pad.3@830.71,35.43
  Bottom Layer w7.87: U2.12@724.41,279.53 805.96,197.98 807.72,199.74 v1(812.72,199.74)
P0.11: ADC1.47 U2.14 | length 521.1
  Top Layer w7.87: v1@905.47,296.63 905.51,296.59 907.11,298.19 ADC1.47@973.78,298.19
  Bottom Layer w7.87: U2.14@676.18,247.05 676.18,209.19 713.25,172.13 726.36,172.13 776.76,121.73 838.66,121.73 848.98,132.05 848.98,152.01 850.79,153.81 850.79,157.88 868.11,175.2 868.11,199.88 907.08,238.86 907.08,301.3 910.89,297.49 v1(910.89,295.28)
P0.17: ADC1.35 JM6.1 P1.3 R4.1 U2.20 | length 1536.2
  Top Layer w7.87: 907.09,-220.44 907.09,-68.98 940.94,-35.12 v5(940.94,23.62) ; ADC1.35@973.78,534.41 974.72,533.46 1135.72,533.46 1149.61,519.58 v3(1149.6,480.31)
  Bottom Layer w7.87: U2.20@581.69,247.05 581.69,185.03 674.8,91.92 674.8,81.22 720.99,35.04 916.93,35.04 ; R4.1@925.2,51.18 925.2,43.31 916.93,35.04 ; R4.1@925.2,52.75 931.66,59.21 931.66,117.76 933.46,119.57 933.46,123.35 947.7,137.59 948.06,137.59 968.5,158.03 968.5,168.11 968.5,182.01 975.13,188.64 989.88,188.64 P1.3@989.88,186.73 ; v5@940.63,24.88 930.47,35.04 916.93,35.04 ; P1.3@989.88,182.82 P1.3@989.88,186.73 ; P1.3@992.13,188.98 P1.3@989.88,186.73 ; P1.3@1000,190.23 1000,238.32 1120.74,359.06 1120.74,370.06 1120.73,464.91 1140.07,484.25 1144.01,480.31 v3(1149.6,480.31)
P0.18: R6.1 U2.21 | length 920.3
  Bottom Layer w7.87: 565.97,185.03 567.91,185.03 567.91,179.32 661.02,86.21 661.02,75.52 731.81,4.73 745.2,4.73 758.58,18.11 776.85,18.11 793.38,1.57 951.03,1.57 986.22,36.77 ; 565.94,185.05 U2.21@565.94,247.05 ; 986.22,37.26 986.22,78.9 993.3,85.98 1030.86,85.98 1036.91,92.03 1036.91,115.36 1062.99,141.44 1062.99,233.92 1113.8,284.73 R6.1@1113.8,289.16
P0.19: U1.17 U2.22 | length 606.8
  Top Layer w7.87: v1(346.46,133.86) 437.49,133.86 444.22,140.59 450.96,133.86 U1.17@452.9,135.8 ; U1.17@451.38,137.79 U1.17@452.09,137.09
  Signal Layer 1 w7.87: v1(346.46,133.86) 381.89,98.43 v2(381.89,-10.82)
  Bottom Layer w7.87: v2(381.89,-10.82) 434.65,41.93 434.65,47.71 467.25,80.31 477.64,80.31 548.23,150.91 548.23,171.26 550.2,173.23 U2.22@550.2,247.05
P0.20: U1.18 U2.23 | length 218.7
  Top Layer w7.87: v3(468.5,102.36) 468.5,102.71 470.47,100.74 471.77,102.04 U1.18@471.77,133.19
  Bottom Layer w7.87: v3(468.5,102.36) 468.5,103.93 468.46,103.96 470.47,101.96 472.44,103.92 475,101.37 534.45,160.82 U2.23@534.45,247.05 U2.23@534.45,248.52
P0.21/RESET: SW1.3 U2.24 | length 735.4
  Bottom Layer w7.87: SW1.3@220.47,-314.96 296.65,-314.96 ; 295.28,-316.34 296.65,-314.96 ; U2.24@518.7,248.03 U2.24@518.7,247.05 518.7,206.57 456.02,143.9 455.94,143.9 419.52,107.48 415.6,107.48 299.21,-8.91 299.21,-312.4 296.65,-314.96
P0.24: ADC1.38 ADC2.38 U1.19 U2.29 | length 3646.2
  Top Layer w7.87: v1(263.78,230.39) 263.78,228.35 321.41,170.72 321.41,123.61 334.65,110.38 334.65,91.26 354.33,71.58 ; 354.33,70.87 470.87,70.87 491.46,91.46 U1.19@491.46,137.09 ; v1(877.95,-303.15) 883.85,-297.24 ADC2.38@973.43,-297.24 ; v3(910.82,469.93) 912.3,469.93 913.78,468.45 918.33,472.99 973.78,472.99 ADC1.38@973.78,475.35
  Signal Layer 1 w7.87: v3(795.28,807.09) 795.28,786.18 806.06,775.39 923.7,775.39 1002.96,696.13 1020.94,696.13 1036.61,680.46 1036.61,601.91 960.66,525.96 960.66,470.25 910.82,470.25 v3(910.82,469.93)
  Signal Layer 2 w7.87: v3(795.28,807.09) 618.11,807.09 570.87,759.84 437.33,759.84 351.97,674.49 351.97,540.94 263.78,452.76 v1(263.78,230.39) 263.78,181.1 254.91,172.24 254.91,32.29 407.48,-120.28 407.48,-334.47 498.2,-425.2 829.45,-425.2 855.9,-398.74 855.9,-325.23 v1(877.95,-303.15)
  Bottom Layer w7.87: v1(263.78,230.39) 265.82,230.39 286.15,250.71 384.57,250.71 417.32,283.47 417.32,307.09 452.76,342.52 U2.29@486.22,342.52
P0.25: JM10.2 U2.37 U6.CLK | length 1919.6
  Top Layer w7.87: U6.CLK@756.55,-508.86 768.17,-508.86 811.02,-466.01 v1(811.02,-370.08)
  Signal Layer 2 w7.87: v3(505.53,654.22) 501.67,654.22 472.44,624.98 472.44,227.95 395.67,151.18 395.67,25.59 423.54,-2.28 423.93,-2.28 433.8,-12.15 433.8,-67.66 454.21,-88.07 454.21,-273.43 572.52,-391.73 789.91,-391.73 811.02,-370.62 v1(811.02,-370.08) v1@813.15,-370.08
  Bottom Layer w7.87: v1(437.01,-70.87) 441.34,-70.87 461.03,-51.18 ; 460.63,-51.42 460.63,-7.87 496.06,27.56 ; 496.06,31.18 496.06,35.04 ; v3(505.53,654.22) 502.04,654.22 471.53,623.7 471.53,544.22 518.7,497.05 U2.37@518.7,485.24
P0.26: JM11.2 U2.38 U4.5 U5.1 | length 1492.5
  Top Layer w7.87: v2(725.39,-198.82) 727.36,-198.82 U4.5@727.36,-235.43
  Signal Layer 2 w7.87: v3(523.62,598.42) v3@523.62,600.39 ; v3@525.98,602.76 525.72,602.49 525.72,553.28 500,527.56 500,216.54 425.2,141.73 425.2,35.04 434.96,25.28 435.35,25.28 461.36,-0.73 461.36,-39.78 483.19,-61.62 483.19,-61.93 498.2,-76.94 498.2,-92.1 497.64,-92.67 497.64,-142.91 511.81,-157.09 511.81,-237.8 541.73,-267.72 657.48,-267.72 693.9,-231.3 693.9,-230.31 v2(725.39,-198.82)
  Bottom Layer w7.87: 492.13,-122.05 494.49,-124.41 506.95,-124.41 512.2,-129.67 v1(512.2,-153.54) ; v3@523.62,598.7 522.59,599.73 497.81,599.73 485.31,587.23 485.31,550.4 534.45,501.26 U2.38@534.45,485.24 ; U5.1@708.94,-140.75 708.94,-145.43 725.39,-161.88 v2@725.39,-198.55
P0.27: JM9.2 U2.39 U6.DOUT | length 1434.1
  Top Layer w7.87: 488.19,-201.18 v1(488.19,-232.28) 488.19,-244.09 488.19,-381.89 543.31,-437.01 622.05,-437.01 664.78,-479.74 665.29,-479.74 694.41,-508.86 U6.DOUT@703.4,-508.86
  Signal Layer 2 w7.87: v1(488.19,-232.28) 476.38,-220.47 476.38,-74.8 469.41,-67.84 469.41,-67.32 447.58,-45.49 447.58,-6.44 429.64,11.5 429.25,11.5 411.42,29.33 411.42,147.44 486.22,222.24 486.22,553.15 v3(507.87,574.8)
  Bottom Layer w7.87: v3(507.87,574.8) 507.87,555.83 550.2,513.51 U2.39@550.2,485.83
P0.29/AIN5: PJ1.8 R1.1 U1.60 U2.41 | length 1120.8
  Top Layer w7.87: U1.60@530.83,485.51 530.83,544.17 529.53,545.47 529.53,574.25 543.83,588.55 543.83,594.73 v3@586.61,637.52
  Signal Layer 2 w7.87: v3(582.68,641.73) 585.47,641.73 582.68,644.52 582.68,681.1 693.34,791.77 733.93,791.77 734.36,791.34 772.91,791.34 790.23,774.02 902.83,774.02 915.75,761.1 986.04,690.81 985.82,690.6 985.82,632.29 v6@1007.87,610.24
  Bottom Layer w7.87: U2.41@581.69,485.24 581.69,520.98 549.09,553.59 549.09,574.32 559.67,584.91 559.67,618.73 v3(582.68,641.73) ; R1.1@1011.81,582.05 1027.29,582.05 1036.19,590.94 1083.63,590.94 1099.26,606.57 1107.16,606.57 PJ1.8@1110.24,609.65 ; R1.1@1013.38,584.85 1014.57,586.03 v6(1014.57,611.04)
P0.30/AIN6: A2.4 JM1.2 PW2.1 R18.2 U2.42 U4.3 U5.14 | length 2406.9
  Top Layer w7.87: v1@543.7,-228.35 542.03,-230.02 542.03,-251.67 558.07,-267.72 U4.3@632.87,-267.72 ; 566.93,538.07 v3(566.93,566.93) ; U4.3@633.86,-263.78 654.72,-263.78 665.35,-253.15 665.35,-224.2 721.2,-168.35 750.15,-168.35 v2(750.62,-167.89)
  Signal Layer 1 w7.87: v3(724.8,769.72) 724.8,742.47 730.66,736.61 843.99,736.61 929.13,651.47 v6@929.13,597.05
  Signal Layer 2 w7.87: v3@565.78,566.93 578.38,566.93 724.41,712.96 v3@724.41,769.72 ; v3(653.54,15.75) 657.48,15.75 724.41,15.75 854.33,145.67 918.55,145.67 960.63,187.75 960.63,561.81 v6@925.2,597.24
  Bottom Layer w7.87: v1(543.31,-228.35) 543.31,-43.31 582.53,-4.08 634.53,-4.08 v3@654.36,15.75 ; v3@566.93,568.13 578.74,556.32 578.74,547.3 595.96,530.08 597.44,530.08 U2.42@597.44,485.24 ; 589.29,771.65 v3@722.55,771.65 ; R18.2@622.05,799.21 622.05,772.64 623.03,771.65 ; U5.14@716.54,-114.17 U5.14@715.83,-114.17 750.62,-148.97 v2(750.62,-167.89) ; A2.4@923.62,630.2 929.13,624.65 v6(929.13,598.43)
P0.31/AIN7: A2.1 JM2.2 PW2.2 R19.2 U2.43 U4.4 U5.13 | length 2704.8
  Top Layer w7.87: 543.31,566.93 543.31,568.54 569.12,594.35 v3@573.15,594.35 ; v1(582.68,-228.35) 570.2,-215.87 570.2,-100.16 595.55,-74.8 712.67,-74.8 732.36,-94.49 v2(763.78,-94.49) ; v1(582.68,-228.35) 590.55,-236.22 U4.4@632.87,-236.22
  Signal Layer 1 w7.87: v6(755.9,759.84) 840.25,759.84 958.36,641.73 v6(1007.87,641.73)
  Signal Layer 2 w7.87: v3@576.45,604.33 702.09,729.96 ; v1(767.72,-3.94) 767.72,23.62 870.08,125.98 938.79,125.98 996.06,183.25 996.06,515.75 1047.24,566.93 1047.24,616.54 1022.05,641.73 v6(1007.87,641.73)
  Bottom Layer w7.87: PW2.2@566.93,755.91 567.14,756.11 676.52,756.11 690.45,742.18 v3@690.45,734.75 ; v3@577.31,595.11 592.52,579.9 592.52,553.01 598.29,547.24 611.5,547.24 613.19,545.55 U2.43@613.19,487.17 ; v1(582.68,-228.35) 771.65,-228.35 787.63,-212.37 787.63,-98.66 787.4,-98.43 787.4,-23.62 v1(767.72,-3.94) ; v3(696.85,736.22) 700.78,732.28 753.59,732.28 R19.2@757.52,728.35 ; U5.13@715.83,-94.49 v2(763.78,-94.49) ; v6@755.9,761.51 759.08,758.34 R19.2@759.08,724.41 ; A2.1@923.62,689.25 985.67,689.25 987.03,687.9 987.03,658.59 v6@1000.82,644.79
  other v3: 577.52,597.24
POR_N: U1.57
REF2V: CC16.2 Q1.3 R7.1 U3.6 | length 250.7
  Bottom Layer w7.87: Q1.3@1238.19,274.36 1238.19,262 1244.36,255.83 1307.23,255.83 1312.99,261.59 1312.99,274.36 ; U3.6@1255.91,368.11 1258.46,365.56 1258.46,327.19 1274.1,311.54 1288.62,311.54 R7.1@1290.63,309.54 ; R7.1@1290.63,310.55 1291.88,310.55 1312.99,289.43 1312.99,274.36 ; CC16.2@1330.71,275.51 1314.14,275.51 1312.99,274.36
RF: L3.2 XX1.1 XX2.1 | length 63.1
  Bottom Layer w7.87: XX1.1@290.31,350.28 290.57,350.53 XX1.1@290.63,350.53 ; XX2.1@290.63,327.4 XX1.1@290.63,350.53 ; XX1.1@291.34,360.67 XX1.1@293.74,358.27 ; L3.2@326.77,350.39 XX1.1@290.63,350.53
SCK: ADC1.40 ADC2.40 U1.30 U2.19 | length 1987.3
  Top Layer w7.87: v6(696.85,90.55) 696.85,96.77 695.53,98.09 707.99,110.55 U1.30@707.99,131.08 ; ADC1.40@973.78,435.98 1059.29,435.98 v3@1076.06,452.76 ; ADC2.40@993.11,-336.61 1064.69,-336.61 v1@1065.67,-337.6
  Signal Layer 2 w7.87: v1@1070.87,-334.65 1119.2,-286.31 1119.2,44.39 1088.97,74.62 1088.97,438.59 v3@1074.81,452.75
  Bottom Layer w7.87: U2.19@597.44,247.05 597.44,190.49 v6@696.8,91.12 ; v6(696.85,90.55) 696.85,78.66 726.7,48.82 886.88,48.82 917.88,79.81 917.88,123.47 919.68,125.28 919.68,129.06 941.99,151.37 942.35,151.37 954.72,163.74 954.72,191.73 986.22,223.23 986.22,244.03 1106.95,364.76 1106.95,442.68 1096.88,452.75 v3(1074.8,452.75) v3@1074.8,452.87
  other v1: 1068.51,-336.61
SP_IN: R25.2 RVSP1.1 | length 1312.4
  Top Layer w19.68: v1(307.09,-346.46) 307.09,-352.61 R25.2@354.09,-399.61
  Signal Layer 1 w19.68: v1(35.11,501.08) 48.76,514.72 205.75,514.72 226.38,494.09 226.38,476.68 233.86,469.21 233.86,303.62 307.09,230.39 ; v1@307.09,-346.85 v1(307.09,-346.46) 307.09,149.52 307.48,149.91 307.48,230.39
  Bottom Layer w19.68: v1(35.11,501.08) 47.54,513.51 187.05,513.51 RVSP1.1@188.98,511.57
SP_MS: CC38.2 L5.1 PW1.2 RVSP1.2 | length 371.2
  Top Layer w13.78: v5(320.87,578.99) v5@322.83,578.99 ; v5@321.41,577.57 v5@322.83,578.99 ; v5@322.83,581.44 v5@322.83,578.99 ; PW1.2@322.83,649.61 350.38,649.61 359.25,640.73 359.25,602.36 CC38.2@362.2,602.36
  Top Layer w19.68: v5@320.15,576.31 320.15,504.24 346.85,477.55 L5.1@346.85,459.96 ; v5@322.83,581.44 343.76,602.36 CC38.2@360.09,602.36
  Bottom Layer w7.87: v5@322.83,578.74 326.5,582.4 v5@328.5,582.4
  Bottom Layer w19.68: RVSP1.2@247.76,511.81 314.69,578.74 v5@322.83,578.74
SPIM_SDIO2: U1.34
SPIM_SDIO3: U1.35
SWDCLK: SW1.4 U2.25 | length 838.5
  Bottom Layer w7.87: SW1.4@220.47,-334.65 185.26,-334.65 165.35,-314.74 165.35,-248.03 196.85,-216.54 242.52,-216.54 279.53,-179.53 279.53,-9.11 500,211.37 500,265.75 U2.25@486.22,279.53 U2.25@476.38,279.53
SWDIO: SW1.5 U2.26 | length 872.4
  Bottom Layer w7.87: SW1.5@220.47,-354.33 185.46,-354.33 151.57,-320.44 151.57,-240.61 193.63,-198.55 241.02,-198.55 ; 241.02,-195.56 243,-193.58 243,-9.59 460.63,208.04 460.63,287.4 468.5,295.28 U2.26@486.22,295.28
UART.RX: JM1.1 U1.58 | length 36.3
  Top Layer w7.87: 567.99,520.94 570.2,518.74 U1.58@570.2,485.51
UART.TX: JM2.1 U1.59 | length 69.2
  Top Layer w7.87: 543.7,550.79 551.85,542.64 551.85,503.58 550.51,502.25 U1.59@550.51,485.51
VAVD: C12.2 RVREG1.1 U1.52 U1.53 | length 180.9
  Top Layer w7.87: 668.62,514.72 677.17,514.72 ; 677.17,519.58 677.17,514.72 ; RVREG1.1@677.17,549.21 677.17,552.17 RVREG1.1@679.41,554.41 ; 688.31,514.72 677.17,514.72
  Top Layer w15.75: U1.53@668.62,485.51 668.62,514.72 ; 677.17,519.58 677.17,549.21 RVREG1.1@685.04,557.09 ; RVREG1.1@685.16,555.38 C12.2@736.22,555.38 ; U1.52@688.31,485.51 688.31,514.72
VBAT: PW1.18 PW2.7 Value1.2 | length 693.5
  Top Layer w7.87: v5(173.23,582.67) 173.23,579.35 173.41,579.17 173.23,578.99 195.01,557.21 ; 195.14,557.09 240.36,557.09 244.09,560.83 PW1.18@244.09,581.73 ; PW1.18@244.09,590.35 PW1.18@244.09,592.52
  Bottom Layer w7.87: v5(173.23,582.67) 173.23,586.61 v5@177.16,582.68 ; 288.39,633.85 337.57,633.85 351.97,648.25 351.97,674.49 370.4,692.91 PW2.7@378.17,692.91 ; PW2.7@377.95,692.91 PW2.7@378.17,692.91 ; Value1.2@657.69,688.16 638.54,669.01 580.43,669.01 561.31,649.88 538.78,649.88 512.67,675.98 439.69,675.98 439.29,675.59 435.83,675.59 434.25,677.17 418.5,692.91 PW2.7@399.61,692.91 PW2.7@378.17,692.91
  Bottom Layer w9.84: v5@177.16,582.68 237.21,582.68 288.39,633.85
VBAT_CONN: CONN_BAT1.1 RVBAT1.1 | length 116
  Top Layer w19.68: RVBAT1.1@395.81,799.21 CONN_BAT1.1@511.81,799.21
VBAT_IN: CC40.2 CC42.2 PW2.6 PW2.8 RVBAT1.2 Value1.1 | length 448.6
  Top Layer w15.75: RVBAT1.2@395.81,740.16 413.91,758.26 475.81,758.26 v3@557.22,676.85
  Top Layer w19.68: CC40.2@334.65,758.26 354.33,738.58 353.29,737.54 v6(353.29,733.84) 358.82,739.37 382.92,739.37 RVBAT1.2@384.12,738.16
  Bottom Layer w11.81: CC42.2@329.29,702.44 346.27,702.44 352.5,708.66 ; v6@352.5,734.22 352.5,711.18 355.01,708.66 PW2.8@399.61,708.66 ; PW2.6@566.93,692.91 614.25,692.91 Value1.1@618.11,689.05
  Bottom Layer w15.75: v3(555.12,673.23) 559.6,673.23 PW2.6@577.31,690.94
VCAP1: ADC1.28 CC10.2 | length 88.3
  Top Layer w7.87: CC10.2@1125.28,734.88 1125.35,734.8 ADC1.28@1125.35,646.61
VCAP2: ADC1.30 CC1.2 | length 60.6
  Top Layer w7.87: CC1.2@1082.28,736.22 1082.28,720.87 1085.98,717.17 ADC1.30@1085.98,677.17
VCAP3: ADC1.55 CC11.2 CC12.2 | length 130.7
  Top Layer w7.87: CC11.2@1163.39,115.51 1163.7,115.2 CC11.2@1164.72,115.2 CC12.2@1204.09,115.2 ; CC11.2@1164.72,115.83 ADC1.55@1164.72,205.67
VCAP4: ADC1.26 CC7.2 | length 59.9
  Top Layer w7.87: ADC1.26@1164.72,665.98 ADC1.26@1165.35,665.35 ; ADC1.26@1164.72,679.13 1164.72,713.23 1169.29,717.8 CC7.2@1169.29,736.22
VCLU: C8.2 C9.2 C10.2 C11.2 CW1.2 CW2.2 LW1.1 U1.29 U1.32 U1.37 U1.54 U1.56 U1.61 | length 1624.3
  Top Layer w7.87: C8.2@505.53,537.4 C8.2@507.49,537.4 ; C8.2@506.49,537.4 509.84,537.4 511.14,536.1 U1.61@511.14,488.4 ; U1.61@511.14,485.51 511.14,455 608.54,455 609.57,456.02 U1.56@609.57,468.5 ; 732.28,54.72 735.83,54.72 751.97,70.87 C10.2@751.97,71.58 ; 747.36,98.09 755.91,89.55 C10.2@755.91,75.2
  Top Layer w9.84: C8.2@507.87,538.07 C8.2@511.14,534.8
  Top Layer w11.81: CW2.2@604.72,567.67 605.46,566.93 CW2.2@606.3,566.93 CW1.2@632.68,566.93 ; U1.56@609.57,485.51 CW2.2@609.57,559.72 ; U1.54@648.94,485.51 648.94,522.58 ; v3(653.54,51.18) 653.54,54.72 653.67,54.72 653.67,59.26 672.83,78.42 672.83,100.5 686.9,114.57 688.31,114.57 U1.29@688.31,137.09 ; 672.48,78.07 671.11,76.7 693.09,54.72 732.28,54.72 ; 745.39,158.37 740.16,163.61 740.16,235.39 740.93,235.39 749.88,244.34 796.7,244.34 799.3,241.73 824.17,241.73 829.69,236.22 C9.2@846.46,236.22 ; 747.36,99.37 U1.32@747.36,135.12 747.36,154.21 ; LW1.1@818.9,618.11 LW1.1@818.9,623.5
  Top Layer w15.75: v6@638.78,527.56 641.73,530.51 CW1.2@641.73,566.93 ; CW1.2@644.66,565.98 665.29,586.61 760.43,586.61 797.32,623.5 818.9,623.5 LW1.1@838.58,623.5
  Signal Layer 1 w15.75: v6(637.79,527.56) 661.42,527.56 712.6,476.38 712.6,236.22 654.27,177.9 v3@654.27,51.18
VREFP: ADC1.24 CC8.2 CC9.2 | length 112.7
  Top Layer w7.87: CC9.2@1204.09,734.39 1204.09,662.05 ADC1.24@1204.72,661.42 ; CC9.2@1204.72,734.39 1206.55,736.22 CC8.2@1243.46,736.22
VSTOR: CC36.2 CC37.2 P1.1 P2.1 PW1.3 PW1.19 | length 1937.5
  Top Layer w11.81: PW1.3@320.87,669.29 375.03,669.29 v6@377,667.32
  Top Layer w15.75: v5(170.07,550.97) 170.08,532.69 171.27,531.5 CC36.2@200.79,531.5 215.48,531.5 223.36,539.37 247.69,539.37 263.39,555.06 PW1.19@263.39,579.4
  Signal Layer 1 w19.68: v6(374.01,665.35) 386.42,652.95 386.42,526.97 393.7,519.68
  Signal Layer 1 w23.62: 393.7,519.68 574.8,519.68 637.8,582.68 708.66,582.68 775.91,515.43 775.91,113.86 817.47,72.29 848.03,102.84 848.03,102.94 867.13,122.05 948.82,122.05 v1@956.69,114.17 ; v1(816.05,-47.24) 816.05,70.87
  Bottom Layer w19.68: v5@173.41,550.62 241.02,550.62 304.56,614.17 345.73,614.17 346.01,614.45 351.29,614.45 ; 352.81,614.45 352.81,617.03 375.1,639.33 375.1,656.82
  Bottom Layer w23.62: v1(816.05,-47.24) 816.05,-107.63 824.56,-116.14 P2.1@863.86,-116.14 ; v1@964.9,113.84 P1.1@1000,113.84
  other v1: 964.57,112.99
W_ACC1_INT1: JM3.1 U1.23 | length 111
  Top Layer w7.87: v3(566.81,50) 570.2,53.39 U1.23@570.2,137.09 U1.23@570.2,139.44
  Bottom Layer w7.87: 547.24,48.62 565.43,48.62 v3(566.81,50)
W_ACC1_INT2: JM4.1 U1.24 | length 163
  Top Layer w7.87: 554.13,-3.94 555.12,-2.95 v3(555.12,25.28) 567.32,25.28 588.86,46.81 588.86,78.88 589.88,79.9 U1.24@589.88,137.09
W_MIC_DOUT: JM9.1 U1.22 | length 357.8
  Top Layer w7.87: 488.19,-185.04 488.19,-133.86 v1(519.68,-102.36) ; v3@524.41,18.9 v3(524.41,19.68) 524.41,23.54 541.73,40.87 541.73,67.05 550.51,75.83 U1.22@550.51,137.09
  Bottom Layer w7.87: v3(524.41,19.68) 525.98,18.11 525.98,2.61 514.17,-9.21 514.17,-22.36 514.17,-29.04 525.98,-40.85 v1@525.98,-102.95
W_P18: JM10.1 U1.21 | length 115.4
  Top Layer w7.87: v3(519.68,50) 519.68,66.3 530.83,77.44 U1.21@530.83,137.09
  Bottom Layer w7.87: 496.06,50.2 519.49,50.2 v3(519.68,50)
W_SDOBME: JM11.1 U1.20 | length 251.3
  Top Layer w7.87: v1(492.12,-31.5) 496.06,-27.56 496.06,62.16 511.14,77.24 U1.20@511.14,137.09
  Bottom Layer w7.87: 492.12,-106.3 v1(492.12,-31.5)
WCT: ADC1.64 CC13.2 | length 67.2
  Top Layer w7.87: CC13.2@1341.89,122.05 1341.89,188.35 ADC1.64@1342.52,188.98
XC1: C18.1 U2.34 X1.1 | length 240.7
  Bottom Layer w7.87: C18.1@322.83,500 352.5,500 X1.1@362.2,490.29 ; X1.1@361.22,488.19 362.24,487.17 362.24,458.23 428.85,458.23 431.1,455.98 431.1,444.37 454.21,421.26 U2.34@486.22,421.26 ; X1.1@370.35,500.27 370.35,479.84 X1.1@370.63,479.57
XC2: C15.1 U2.35 X1.3 | length 218
  Bottom Layer w7.87: X1.3@405.51,547.8 X1.3@406.06,547.24 ; C15.1@409.45,586.61 411.69,584.37 X1.3@411.69,547.38 ; X1.3@410,544.73 X1.3@417.32,537.4 ; X1.3@411.69,546.87 X1.3@411.69,547.38 ; 436.87,547.38 X1.3@411.69,547.38 ; 437.01,547.85 439.69,545.17 439.69,466.88 469.56,437.01 U2.35@486.22,437.01
pads on no net: A1.2 ADC1.17 ADC1.18 ADC1.27 ADC1.29 ADC1.42 ADC1.44 ADC1.45 ADC1.46 ADC1.60 ADC1.61 ADC1.62 ADC1.63 ADC2.17 ADC2.18 ADC2.27 ADC2.29 ADC2.42 ADC2.44 ADC2.45 ADC2.46 ADC2.60 ADC2.61 ADC2.62 ADC2.63 CONN_BAT1.0 J2. J2.2 J2.3 J2.4 J2.6 J2.7 J2.8 J2.9 J2.10 J2.11 P1.4 P2.4 PEL1.0 PEL1.4 PEL2.0 PEL2.4 PJ1.0 PW2.4 PW2.9 PW2.11 PW2.12 SW1.0 U1.2 U1.3 U1.4 U1.5 U1.7 U1.8 U1.9 U1.10 U1.11 U1.13 U1.14 U1.15 U1.16 U1.25 U1.27 U1.51 U1.55 U2.44 U3.3 U3.5 U5.10 U5.11 YW1.1

## Polygon pours and split planes (outlines as drawn)
AVDD_B on Bottom Layer "Bottom Layer-No Net" (solid, remove dead copper, pour order 14): 1050.05,-7.87 1382.9,-7.87 1381.58,-23.32 1377.95,-23.62 1208.66,-192.91 1208.66,-250 1208.66,-523.59 1338.53,-653.54 1350.25,-653.54 1357.77,-653.54 1373.51,-669.29 1373.51,-692.91 1373.51,-693.42 1358.27,-708.66 1177.16,-708.66 1157.48,-688.98 1153.54,-685.04 1153.54,-185.04 1153.54,-152.96 1037.87,-37.28 1037.87,-7.87
DGND on Bottom Layer "Bottom Layer-No Net" (solid, shelved, pour order 16): 11.81,830.71 11.81,464.57 220.13,464.57 221,-716.54 970.71,-716.54 970.71,169.29 1023.62,169.29 1023.62,244.09 1129.92,350.39 1129.92,464.57 1184.76,464.57 1271.65,551.46 1271.65,691.15 975.12,691.15 972.44,691.15 972.44,830.71
AGND on Bottom Layer "Bottom Layer-No Net" (solid, shelved, pour order 20): 1185.04,460.63 1236.22,511.81 1272.83,548.42 1275.59,551.18 1275.59,695.06 975.77,695.06 976.38,695.97 976.38,830.71 1610.24,830.71 1610.24,-716.54 974.27,-716.54 974.27,165.23 1027.96,165.23 1027.96,244.04 1129.98,346.46 1133.86,350.35 1133.86,459.61 1133.86,460.63
AGND on Signal Layer 2 "Bottom Layer-No Net" (solid, shelved, pour order 21): 1183.95,464.57 1235.13,515.75 1271.74,552.36 1274.5,555.12 1274.5,699 974.68,699 975.29,699.91 975.29,834.65 1609.14,834.65 1609.14,-716.54 973.18,-716.54 973.18,169.17 1026.87,169.17 1026.87,247.97 1128.89,350.39 1132.77,354.29 1132.77,463.54 1132.77,464.57
DGND on Signal Layer 2 "Bottom Layer-No Net" (solid, shelved, pour order 22): 10.72,834.65 10.72,468.5 219.04,468.5 219.91,-716.54 969.62,-716.54 969.62,173.23 1022.53,173.23 1022.53,248.03 1128.83,354.33 1128.83,468.5 1183.67,468.5 1270.56,555.39 1270.56,695.08 974.03,695.08 971.35,695.08 971.35,834.65
MIC_DVDD on Signal Layer 2 "Bottom Layer-No Net" (solid, pour order 19): 827.66,-592.83 802.07,-567.24 797.15,-567.24 631.68,-567.24 627.74,-571.18 623.92,-575 623.92,-614.49 627.86,-618.43 627.86,-633.86 827.66,-633.86
BME_DVDD on Signal Layer 2 "Bottom Layer-No Net" (solid, pour order 18): 790.91,-271.65 566.22,-271.65 566.22,-291.32 566.22,-318.58 645.28,-397.64 790.91,-397.64
MLIMU_DVDD on Signal Layer 2 "Bottom Layer-No Net" (solid, pour order 17): 790.91,-35.43 566.22,-35.43 566.22,-55.1 566.22,-161.42 790.91,-161.42
DVDD on Signal Layer 1 "Bottom Layer-No Net" (solid, pour order 15): 192.91,712.6 937.01,712.6 1118.17,531.43 1118.16,388.36 1036.89,307.09 965.63,307.09 785.84,482.81 192.91,482.81
DGND on Signal Layer 1 "Bottom Layer-No Net" (solid, shelved, pour order 23): 1227.57,569.33 1227.57,517.6 1179.75,469.78 1128.02,469.78 1126.74,468.5 1126.74,354.33 1115.55,343.14 1115.55,173.23 1099.06,142.75 1099.06,-716.54 217.82,-716.54 216.95,468.5 8.63,468.5 8.63,834.65 969.26,834.65 969.26,695.08 1030.8,695.08 1030.8,569.33
AGND on Signal Layer 1 "Bottom Layer-No Net" (solid, shelved, pour order 24): 1181.86,464.57 1233.04,515.75 1233.04,575.45 1035.54,575.45 1035.54,699 972.6,699 973.2,699.91 973.2,834.65 1607.06,834.65 1607.06,-716.54 1110.64,-716.54 1110.64,143.13 1126.8,173.14 1126.8,265.93 1126.8,350.39 1130.68,354.29 1130.68,463.54 1130.68,464.57
DVDD on Signal Layer 1 "Bottom Layer-No Net" (solid, pour order 15): 498.69,114.37 824.31,114.37 912.96,25.72 912.97,-469.06 917.32,-473.41 1074.8,-630.89 1074.8,-687.55 1074.8,-704.73 1074.8,-716.54 943.63,-716.54 670.69,-443.59 670.69,-68.17 498.69,-68.17
AGND on Top Layer "Bottom Layer-No Net" (solid, shelved, pour order 25): 1181.86,464.57 1233.04,515.75 1233.04,575.45 1035.54,575.45 1035.54,699 972.6,699 973.2,699.91 973.2,834.65 1607.06,834.65 1607.06,-716.54 1110.64,-716.54 1110.64,143.13 1126.8,173.14 1126.8,265.93 1126.8,350.39 1130.68,354.29 1130.68,463.54 1130.68,464.57
DGND on Top Layer "Bottom Layer-No Net" (solid, shelved, pour order 26): 1227.57,569.33 1227.57,517.6 1179.75,469.78 1128.02,469.78 1126.74,468.5 1126.74,354.33 1115.55,343.14 1115.55,173.23 1099.06,142.75 1099.06,-716.54 217.82,-716.54 216.95,468.5 8.63,468.5 8.63,834.65 969.26,834.65 969.26,695.08 1030.8,695.08 1030.8,569.33

## Other copper
Top Layer:
  rectangle net AGND: 934.17,712.6 1024.72,807.09

## Silkscreen, mask and mechanical layers (free items; w line width, h text height)
Bottom Overlay:
  text "BioWolf 2.0" at 1590.55,791.34 h19.68
  text "UNIBO/ETH" at 1590.55,761.85 h19.68
Mechanical 1:
  lines w10: 0,-732.28 1610.24,-732.28 1610.24,830.51 0,830.51 0,-732.28
  lines w27.56: 0,-732.28 0,830.51 1610.24,830.51 1610.24,-732.28 0,-732.28

## Dimensions
1610.24,830.51 to 1633.86,-732.28 on Mechanical 7
0,830.51 to 1610.24,830.51 on Mechanical 7